# Altium PCB Back_Alt.PcbDoc
Units mm, origin at the board's own origin, x right, y up, seen from the top; angles counter-clockwise.
Board outline 109.4 x 109.4 mm, 2 copper layers (Top Layer, Bottom Layer); 3 components, 2 nets, 6 pads, 0 vias.
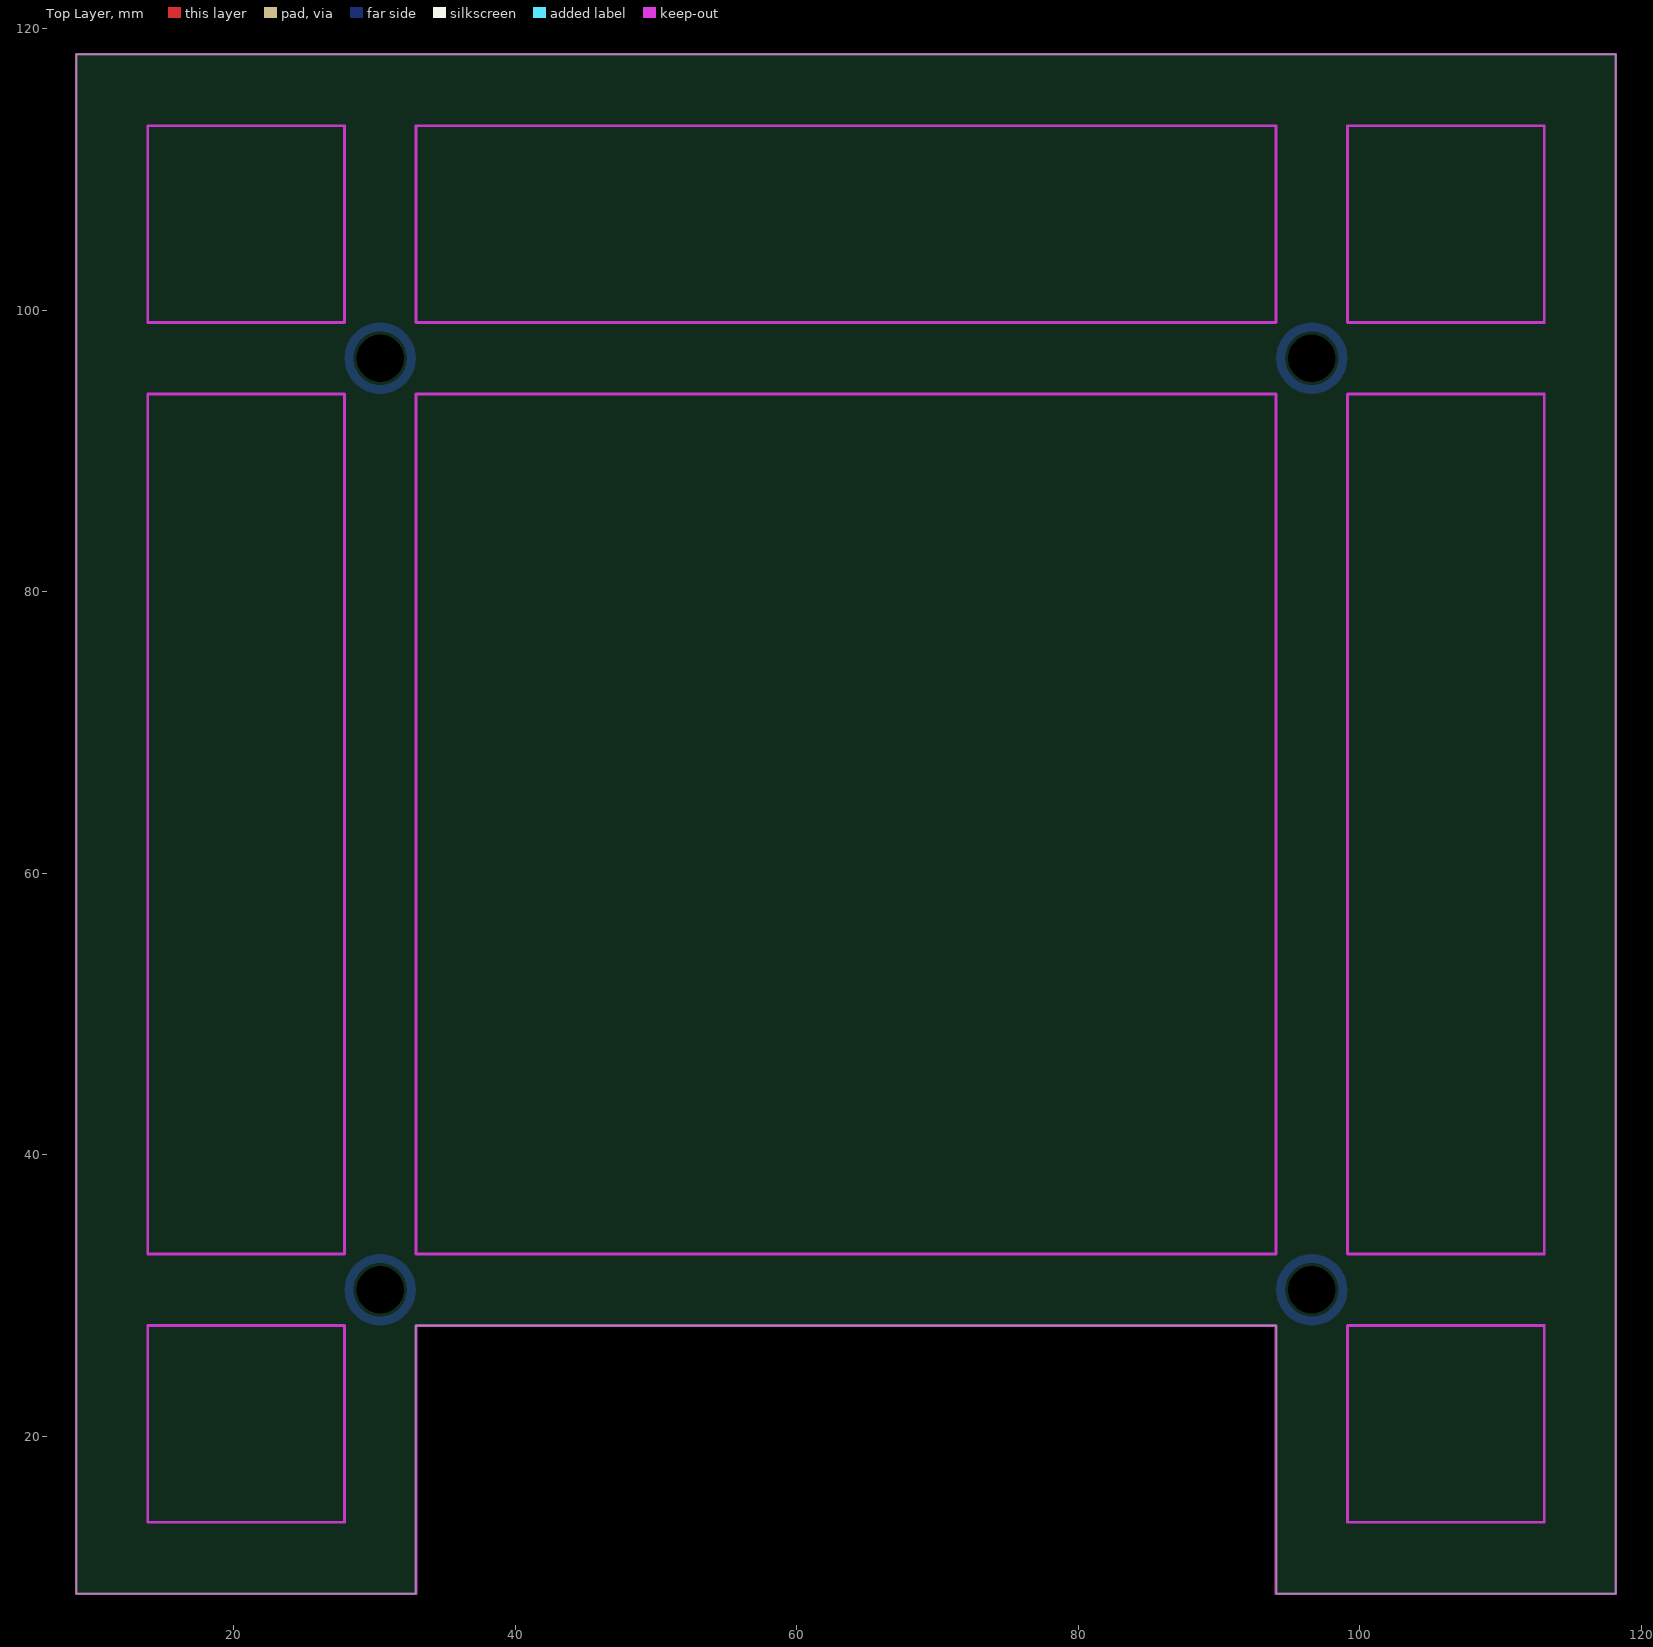
[diagram p0: Top Layer view]
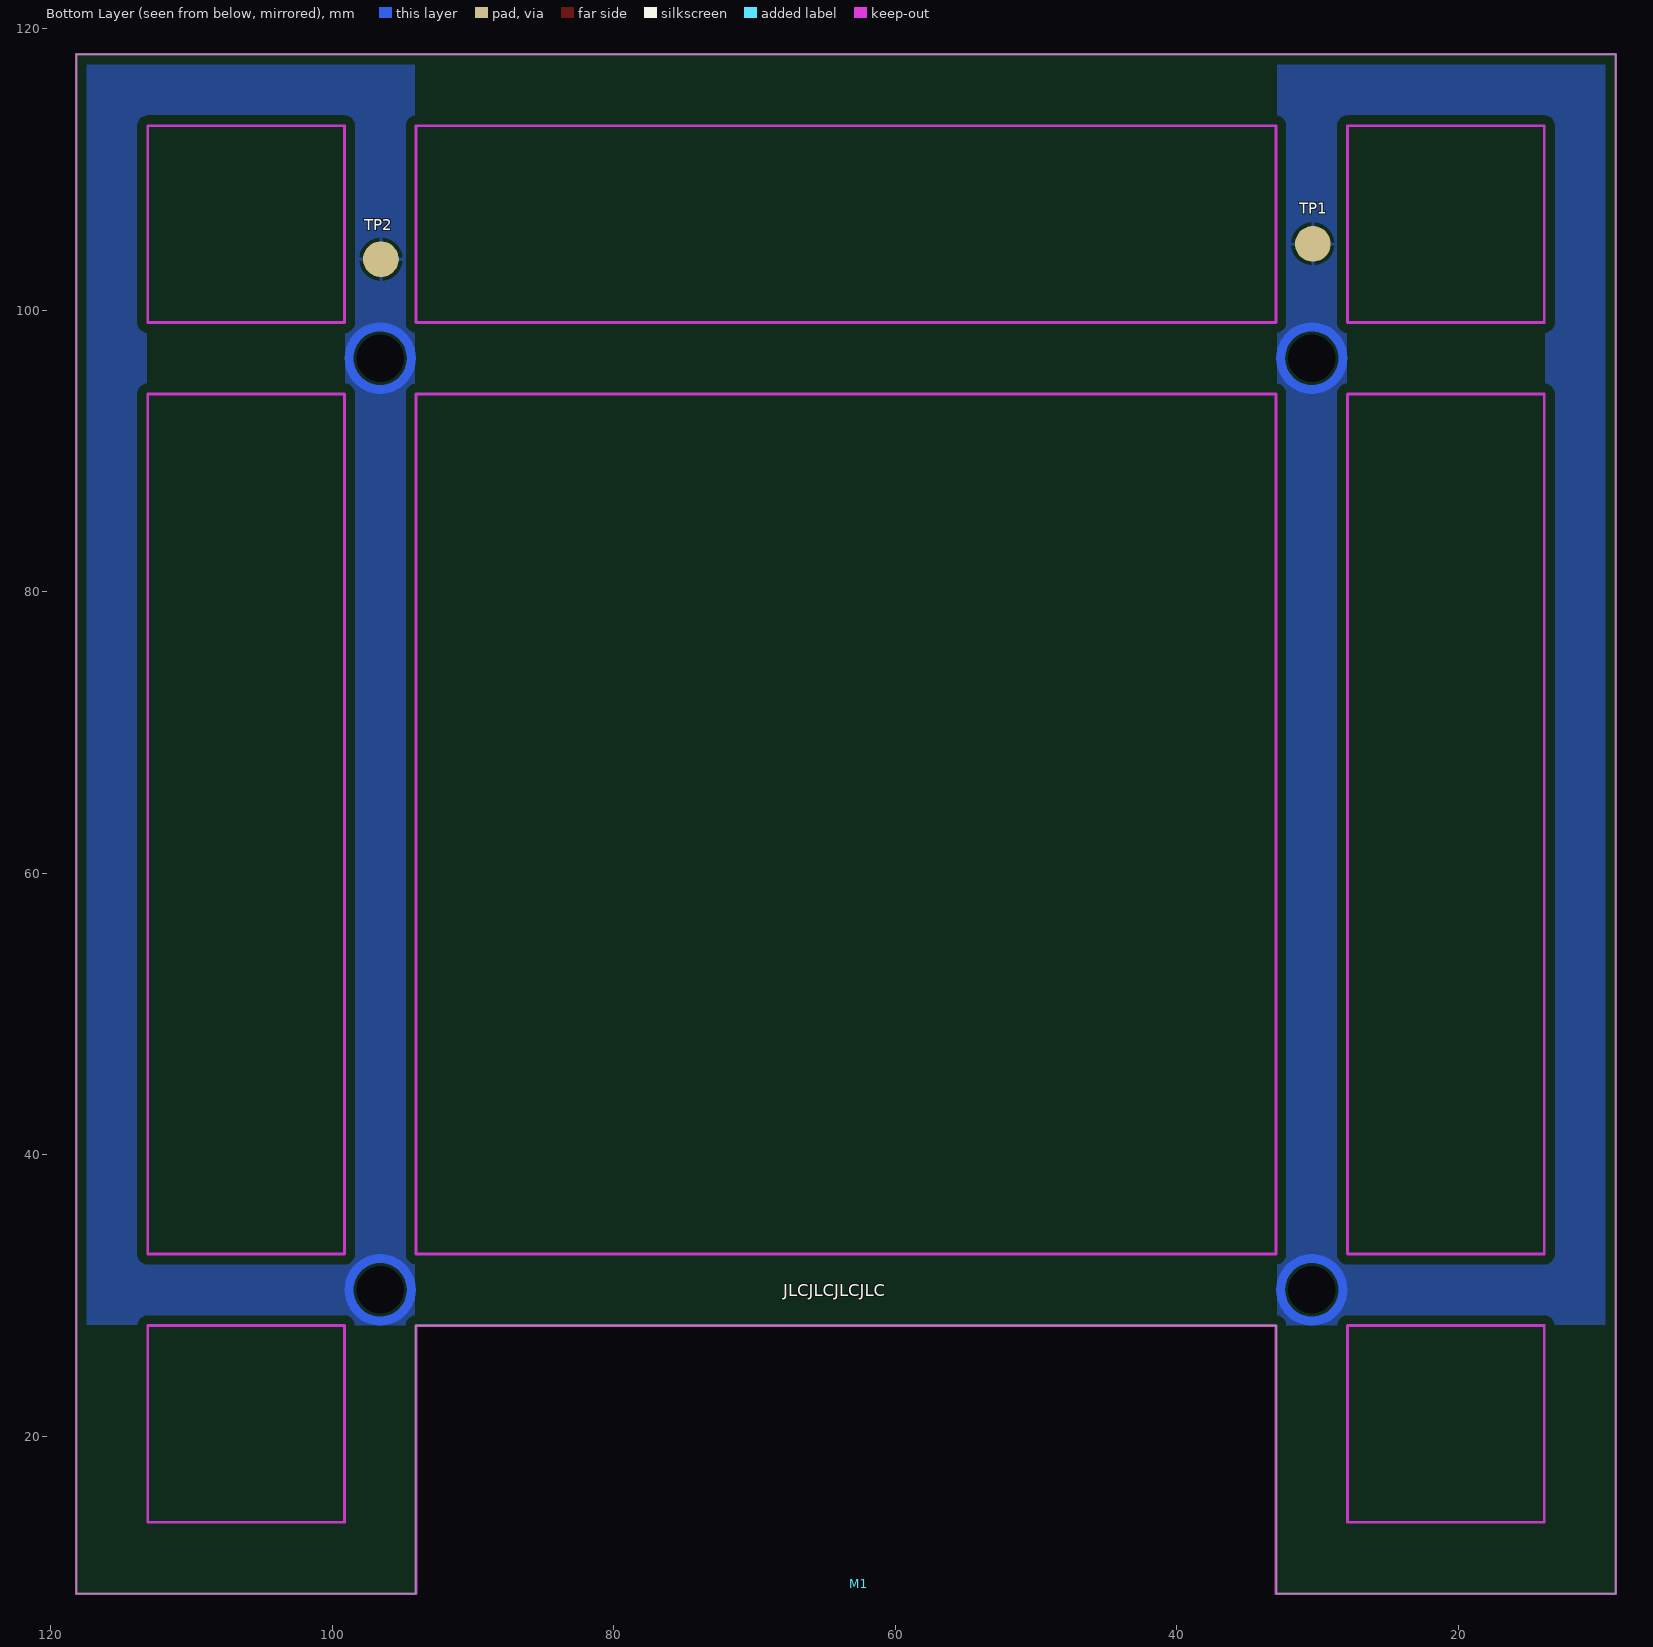
[diagram p1: Bottom Layer view, seen from below]

## Layer stack, top to bottom
Top Solder: solder mask 0.0102, Solder Resist, Dk 3.5
Top Layer: signal copper 0.0356
Dielectric 1: dielectric 0.32, FR-4, Dk 4.8
Bottom Layer: signal copper 0.0356
Bottom Solder: solder mask 0.0102, Solder Resist, Dk 3.5

## Board outline
8.801,8.801 8.801,118.199 118.199,118.199 118.199,8.801 94.06,8.801 94.06,27.86 32.94,27.86 32.94,8.801

## Design rules (kind name [scope] priority, off if disabled: settings)
Clearance Clearance_Poly [All vs InPoly] p1: gap=0.635 ignorepadtopadclearanceinfootprint=FALSE
Clearance [All] p2: gap=0.163 ignorepadtopadclearanceinfootprint=FALSE except(0: Arc-Hole Track-Hole SMDPad-Hole THPad-Hole Via-Hole Fill-Hole Poly-Hole Region-Hole Text-Hole)
HoleSize [All] p1: absolutevalues=TRUE maxlimit=2539.975 minlimit=0.025 maxpercent=80.000 minpercent=20.000
MinimumSolderMaskSliver [All] p1: minsoldermaskwidth=0.152
PolygonConnect [All] p1: connectstyle=Relief reliefconductorwidth=0.254 reliefentries=4 polygonreliefangle="90 Angle" airgapwidth=0.254
RoutingVias [All] p1: holewidth=0.711 width=1.27 viastyle="Through Hole" minholewidth=0.711 minwidth=1.27 maxholewidth=0.711 maxwidth=1.27
SilkToSolderMaskClearance [IsPad] p1: minsilkscreentomaskgap=0 clearancetoexposedcopper=TRUE
SolderMaskExpansion [All] p1: expansion=0.102 istentingtop=FALSE
Width [All] p1: maxlimit=254 minlimit=0.152 preferedwidth=0.254
27 further rules are at their usual default settings.

## Components (designator, comment, footprint, x,y, rotation, side; value= is the part's Value field where it differs from the comment)
M1 "JLC_NUMBER" JLC_NUMBER 62.611,9.525 r180 bottom
TP1 "TESTPOINT_100mil" TESTPOINT_100mil 30.328,104.724 r180 bottom
TP2 "TESTPOINT_100mil" TESTPOINT_100mil 96.545,103.632 r180 bottom

## Footprints (in the part's own frame and the unit in brackets; to place one, negate y for a bottom-side part, rotate by r counter-clockwise, add the part's x,y. Pads: shape width x height; smd on the part's side, far side on the other; paste and mask are expansions set on the pad)
JLC_NUMBER [mm]
TESTPOINT_100mil [mm]
  round 2.54 smd: 1(0,0)

## Part data
M1: "JLC Order Number Location", Manufacturer Part Number=JLC_NUMBER, PartNumber=JLC_NUMBER
TP1 TP2: Manufacturer Part Number=TESTPOINT_100mil, PartNumber=TESTPOINT_100mil

## Free pads (board coordinates)
  round 0.254 hole 3.4 unplated: 0(30.4,30.4) 0(30.4,96.6) 0(96.6,30.4) 0(96.6,96.6)

## Nets (pads, with @x,y where several pads share a name; then routed paths per layer and width w, separated by ;. In a path a pad name is that pad's centre, name@x,y a point inside that pad or via, vN(x,y) a via of type N, cw(c..) or ccw(c..) an arc to the next point about the centre after c; other vN are vias at no path point)
TP1: TP1.1 | length 27.8
  Bottom Layer w0.635: 32.614,30.4 ccw(c30.4,30.4) 32.614,30.4 ; 32.614,96.6 ccw(c30.4,96.6) 32.614,96.6
TP2: TP2.1 | length 27.8
  Bottom Layer w0.635: 98.814,30.4 ccw(c96.6,30.4) 98.814,30.4 ; 98.814,96.6 ccw(c96.6,96.6) 98.814,96.6

## Polygon pours and split planes (outlines as drawn)
TP2 on Bottom Layer "TP2_L02_P001" (solid, remove dead copper, pour order 1): 94.06,27.86 94.132,27.932 94.132,118.212 118.212,118.212 118.186,118.186 118.186,27.915
TP1 on Bottom Layer "TP1_L02_P000" (solid, remove dead copper, pour order 0): 32.94,27.86 32.868,27.932 32.868,118.212 8.788,118.212 8.814,118.186 8.814,27.915

## Keep-outs
Keep-Out Layer:
  lines w0.2: 8.801,8.801 32.94,8.801 32.94,27.86 94.06,27.86 94.06,8.801 118.199,8.801 118.199,118.199 8.801,118.199 8.801,8.801 ; 13.881,13.881 27.86,13.881 27.86,27.86 13.881,27.86 13.881,13.881 ; 13.881,32.94 13.881,94.06 27.86,94.06 27.86,32.94 13.881,32.94 ; 13.881,99.14 13.881,113.119 27.86,113.119 27.86,99.14 13.881,99.14 ; 32.94,32.94 32.94,94.06 94.06,94.06 94.06,32.94 32.94,32.94 ; 32.94,99.14 32.94,113.119 94.06,113.119 94.06,99.14 32.94,99.14 ; 99.14,13.881 113.119,13.881 113.119,27.86 99.14,27.86 99.14,13.881 ; 99.14,32.94 113.119,32.94 113.119,94.06 99.14,94.06 99.14,32.94 ; 99.14,99.14 99.14,113.119 113.119,113.119 113.119,99.14 99.14,99.14

## Other copper
Multi-Layer:
  pour cut-out: 27.889,99.111 27.889,94.082 27.864,94.107 13.843,94.107 13.843,99.085
  pour cut-out: 99.111,99.111 99.111,94.082 99.136,94.107 113.157,94.107 113.157,99.085

## Silkscreen, mask and mechanical layers (free items; w line width, h text height)
Top Solder:
  region: 32.94,94.06 94.06,94.06 94.06,32.94 32.94,32.94
  region: 13.881,27.86 27.86,27.86 27.86,13.881 13.881,13.881
  region: 99.14,27.86 113.119,27.86 113.119,13.881 99.14,13.881
  region: 99.14,94.06 113.119,94.06 113.119,32.94 99.14,32.94
  region: 99.14,113.119 113.119,113.119 113.119,99.14 99.14,99.14
  region: 32.94,113.119 32.94,99.14 94.06,99.14 94.06,113.119
  region: 13.881,113.119 27.86,113.119 27.86,99.14 13.881,99.14
  region: 13.881,94.06 27.86,94.06 27.86,32.94 13.881,32.94
  lines w0.2: 32.94,13.881 32.94,27.86 ; 94.06,10.461 94.06,27.86 32.94,27.86 ; 32.94,27.86 32.94,27.86
Bottom Solder:
  region: 13.881,94.06 27.86,94.06 27.86,32.94 13.881,32.94
  region: 13.881,113.119 27.86,113.119 27.86,99.14 13.881,99.14
  region: 32.94,113.119 32.94,99.14 94.06,99.14 94.06,113.119
  region: 99.14,113.119 113.119,113.119 113.119,99.14 99.14,99.14
  region: 99.14,94.06 113.119,94.06 113.119,32.94 99.14,32.94
  region: 99.14,27.86 113.119,27.86 113.119,13.881 99.14,13.881
  region: 13.881,27.86 27.86,27.86 27.86,13.881 13.881,13.881
  region: 32.94,94.06 94.06,94.06 94.06,32.94 32.94,32.94
Mechanical 1:
  the board outline again, w0.2

## Text inside footprints (layer, text, board x,y; h text height)
M1: Bottom Overlay "JLCJLCJLCJLC" at 67.949,29.943 h0.85